# Altium PCB SLT.PcbDoc (part 2 of 8)
Units mm, origin at the board's own origin, x right, y up, seen from the top; angles counter-clockwise.
Board outline 150 x 66 mm, 6 copper layers (L1 TOP, L2 GND 1, L3 SIGNAL, L4 PWR, L5 GND 2, L6 BOT), stack 1.598 mm thick; 797 components, 541 nets, 2680 pads, 2120 vias.
Unrouted connection lines stored in the file: 31.
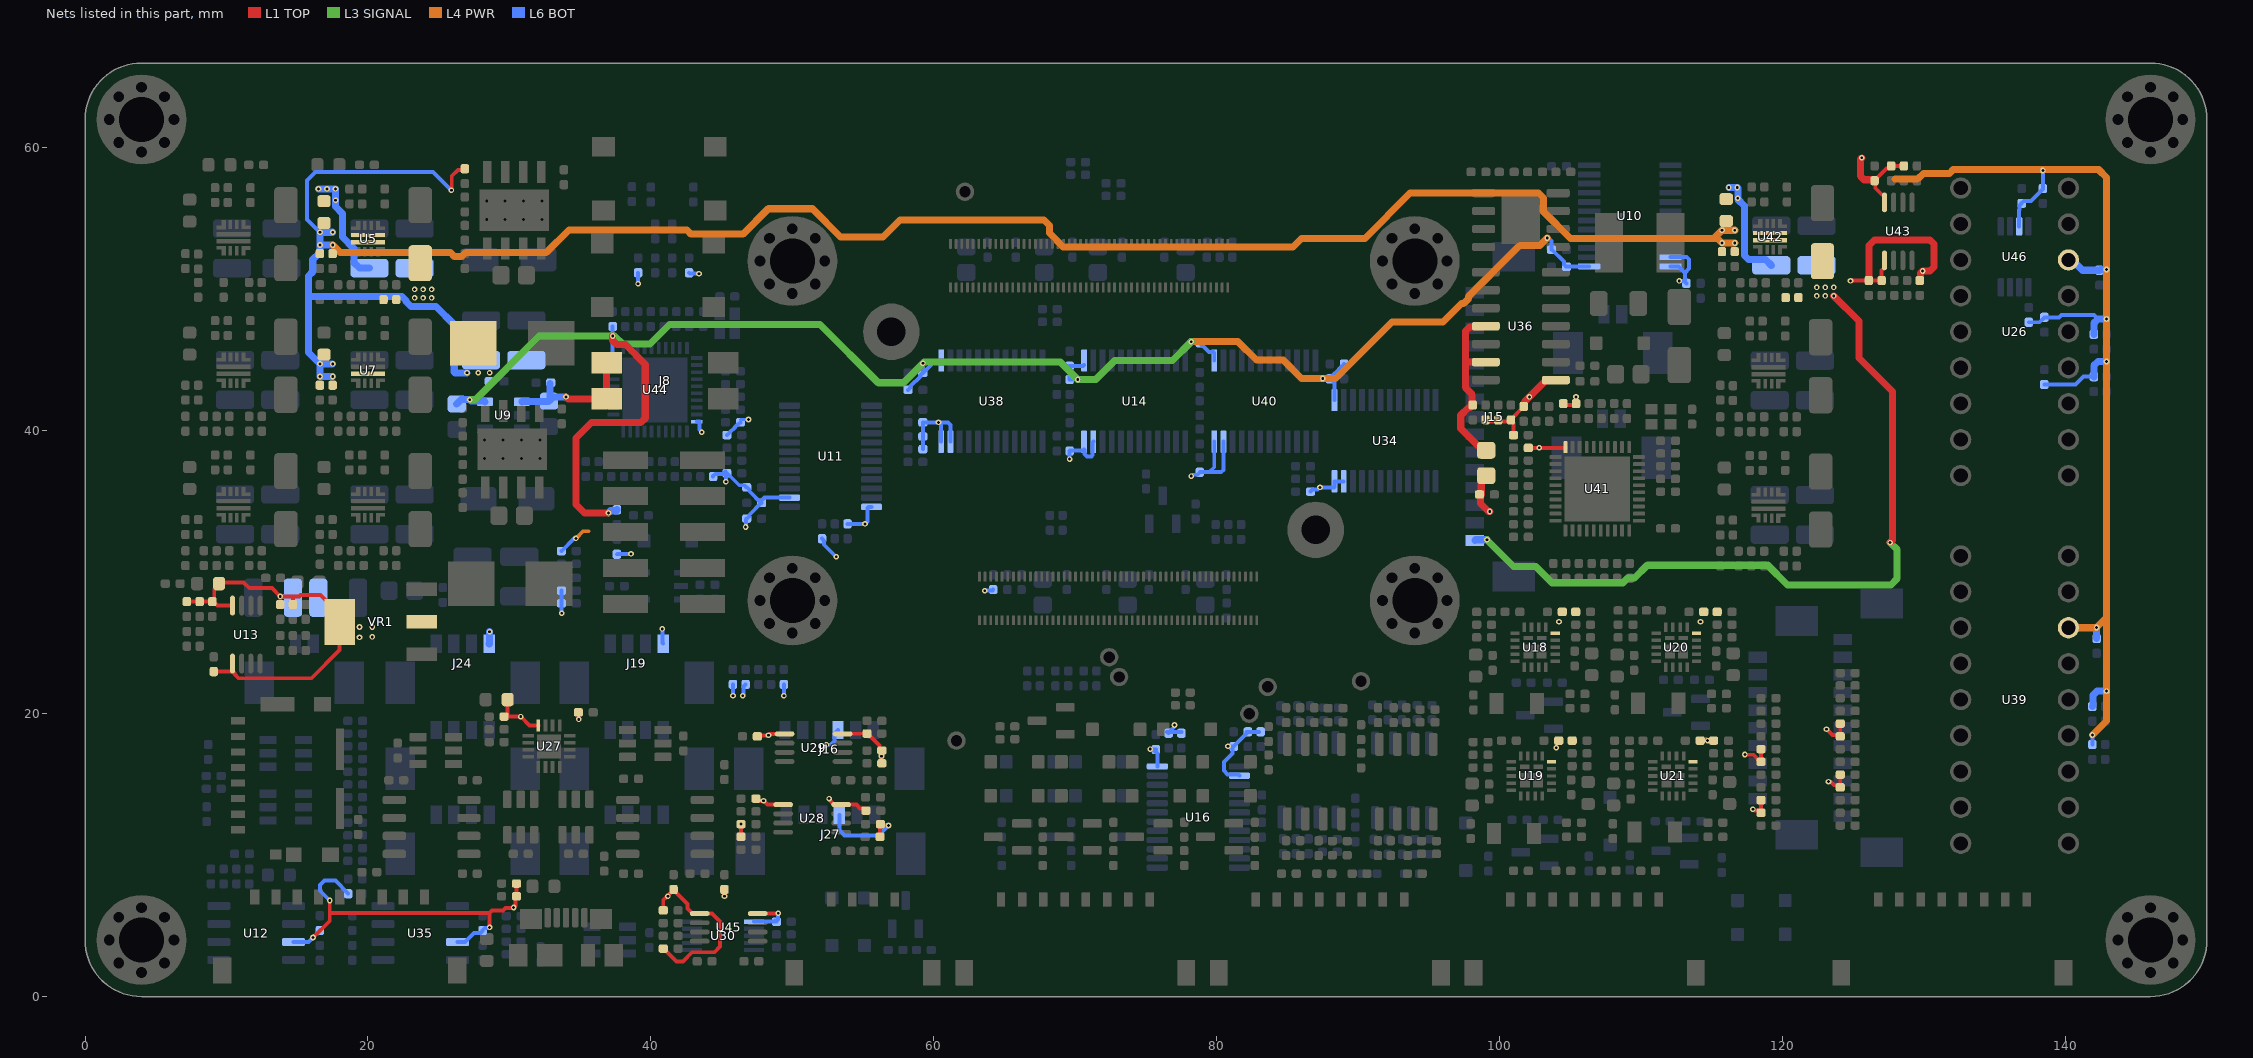
[diagram p6: the nets of this part, all layers, seen from the top]

## Components (designator, comment, footprint, x,y, rotation, side; value= is the part's Value field where it differs from the comment) (continued)
R259 "22R" RES_C_1005X40 18.9,5.2 r270 bottom
R260 "10k" RES_C_1005X40 100.8,41.3 r90 top
R261 "22R" RES_C_1005X40 10.7,8.5 r270 bottom
R262 "4.7k" RES_C_1005X40 99,41.3 r270 top
R263 "22R" RES_C_1005X40 8.9,8.5 r90 bottom
R264 "10k" RES_C_1005X40 99.9,41.3 r270 top
R265 "22R" RES_C_1005X40 28.1,3.1 r270 bottom
R266 "4.7k" RES_C_1005X40 41.4,3.4 r0 top
R267 "0.2R/1W" RES_C_3216X70 108.4,49 r0 top
R268 "1k" RES_C_1005X40 102.5,58.3 r0 top
R269 "10k" RES_C_1005X40 104.5,58.3 r180 top
R270 "4.7k" RES_C_1005X40 41.4,6.1 r0 top
R271 "22R" RES_C_1005X40 41.4,5.2 r180 top
R272 "22R" RES_C_1005X40 41.4,4.3 r180 top
R273 "22R" RES_C_1005X40 47.1,2.5 r180 top
R274 "10k" RES_C_1005X40 43.8,2.5 r180 top
R275 "10k" RES_C_1005X40 119,13 r0 top
R276 "DNP/0R" RES_C_1005X40 81.721,32.85 r90 bottom
R277 "4.7k" RES_C_1005X40 127.675,58.2 r270 top
R278 "4.7k" RES_C_1005X40 128.575,58.2 r270 top
R279 "22R" RES_C_1005X40 127.9,50.1 r270 top
R280 "22R" RES_C_1005X40 128.8,50.1 r270 top
R281 "22R" RES_C_1005X40 106.3,41.4 r270 top
R282 "22R" RES_C_1005X40 107.2,41.4 r270 top
R283 "10k" RES_C_1005X40 114.2,49.9 r270 bottom
R284 "10k" RES_C_1005X40 104.2,52.8 r180 bottom
R285 "10k" RES_C_1005X40 104.2,58.7 r180 bottom
R286 "22R" RES_C_1005X40 108.1,41.4 r270 top
R287 "22R" RES_C_1005X40 109,41.4 r270 top
R288 "22R" RES_C_1005X40 102.6,41.2 r270 top
R289 "10k" RES_C_1005X40 45.8,40.6 r0 bottom
R290 "22R" RES_C_1005X40 45.8,41.5 r180 bottom
R291 "22R" RES_C_1005X40 45.8,42.4 r180 bottom
R292 "22R" RES_C_1005X40 45.8,43.3 r180 bottom
R293 "22R" RES_C_1005X40 45.8,44.2 r180 bottom
R294 "22R" RES_C_1005X40 45.9,37.9 r180 bottom
R295 "22R" RES_C_1005X40 66.6,22.5 r90 bottom
R296 "22R" RES_C_1005X40 75,36.425 r90 bottom
R297 "DNP/22R" RES_C_1005X40 69.5,22.5 r270 bottom
R298 "DNP/22R" RES_C_1005X40 68.6,22.5 r270 bottom
R299 "22R" RES_C_1005X40 103.5,41.2 r270 top
R300 "22R" RES_C_1005X40 45.9,38.8 r180 bottom
R301 "470k" RES_C_1005X40 116.617,52.141 r90 top
R302 "47k" RES_C_1005X40 120.217,49.941 r270 top
R303 "47k" RES_C_1005X40 121.117,49.941 r270 top
R304 "22R" RES_C_1005X40 117.917,49.941 r270 top
R305 "DNP/10k" RES_C_1005X40 117.017,49.941 r270 top
R306 "133k" RES_C_1005X40 115.717,49.941 r270 top
R307 "10k" RES_C_1005X40 118.817,49.941 r270 top
R308 "1.6k" RES_C_1005X40 118.71,56.706 r270 top
R309 "4.7k" RES_C_1005X40 58.7,38.7 r180 bottom
R310 "4.7k" RES_C_1005X40 52.1,32.9 r90 bottom
R311 "22R" RES_C_1005X40 53,32.9 r90 bottom
R312 "22R" RES_C_1005X40 58.7,37.8 r180 bottom
R313 "4.7k" RES_C_1005X40 47.3,33.8 r0 bottom
R314 "10k" RES_C_1005X40 68.7,39.1 r90 bottom
R315 "4.7k" RES_C_1005X40 47.3,36 r0 bottom
R316 "4.7k" RES_C_1005X40 58.7,39.6 r0 bottom
R317 "10k" RES_C_1005X40 69.6,43.1 r90 bottom
R318 "22R" RES_C_1005X40 77.6,21.5 r180 top
R319 "22R" RES_C_1005X40 77.6,20.6 r180 top
R320 "10k" RES_C_1005X40 69.6,41.1 r270 bottom
R321 "10k" RES_C_1005X40 86.1,36.6 r180 bottom
R322 "22R" RES_C_1005X40 55.8,19.5 r0 top
R323 "22R" RES_C_1005X40 55.7,14.1 r180 top
R324 "470k" RES_C_1005X40 116.492,42.665 r90 top
R325 "47k" RES_C_1005X40 120.092,40.465 r270 top
R326 "47k" RES_C_1005X40 120.992,40.465 r270 top
R327 "22R" RES_C_1005X40 117.792,40.465 r270 top
R328 "DNP/10k" RES_C_1005X40 116.892,40.465 r270 top
R329 "47k" RES_C_1005X40 115.592,40.465 r270 top
R330 "10k" RES_C_1005X40 118.692,40.465 r270 top
R331 "1.6k" RES_C_1005X40 118.585,47.231 r270 top
R332 "470k" RES_C_1005X40 116.493,33.165 r90 top
R333 "47k" RES_C_1005X40 120.093,30.965 r270 top
R334 "47k" RES_C_1005X40 120.993,30.965 r270 top
R335 "22R" RES_C_1005X40 117.793,30.965 r270 top
R336 "DNP/10k" RES_C_1005X40 116.893,30.965 r270 top
R337 "47k" RES_C_1005X40 115.593,30.965 r270 top
R338 "10k" RES_C_1005X40 118.693,30.965 r270 top
R339 "1.6k" RES_C_1005X40 118.586,37.731 r270 top
R340 "10k" RES_C_1005X40 89,44.2 r90 bottom
R341 "10k" RES_C_1005X40 86.1,37.5 r180 bottom
R342 "10k" RES_C_1005X40 58.7,41.5 r180 bottom
R343 "10k" RES_C_1005X40 58.7,42.9 r180 bottom
R344 "10k" RES_C_1005X40 68.7,43.1 r90 bottom
R345 "10k" RES_C_1005X40 78.8,39.6 r270 bottom
R346 "10k" RES_C_1005X40 78.8,43.6 r90 bottom
R347 "10k" RES_C_1005X40 78.8,41.6 r270 bottom
R348 "10k" RES_C_1005X40 41.6,8.1 r90 top
R349 "10k" RES_C_1005X40 45.2,8.1 r90 top
R350 "10k" RES_C_1005X40 29.975,7.1 r180 top
R351 "10k" RES_C_1005X40 29.975,8 r180 top
R352 "10k" RES_C_1005X40 104.5,41.4 r90 top
R353 "10k" RES_C_1005X40 101.5,39.7 r180 top
R354 "10k" RES_C_1005X40 45.9,39.7 r180 bottom
R355 "10k" RES_C_1005X40 44.4,37.3 r270 bottom
R356 "1k" RES_C_1005X40 12.1,58.8 r180 top
R357 "4.7k" RES_C_1005X40 138.5,43.8 r90 bottom
R358 "4.7k" RES_C_1005X40 138.5,47.5 r270 bottom
R359 "4.7k" RES_C_1005X40 137.4,48.2 r90 bottom
R360 "4.7k" RES_C_1005X40 138.4,56.6 r270 bottom
SW1 "PushB" TACTSW6X6SM 40.5,51 r0 top locked
SW2 "PushB" TACTSW6X6SM 40.6,57.825 r0 top locked
TP3 "" Testpoint_TH_D130H80 72.4,24 r90 top
TP4 "" Testpoint_TH_D130H80 73.1,22.6 r90 top
TP5 "" Testpoint_TH_D130H80 62.2,56.9 r90 top
TP6 "" Testpoint_TH_D130H80 61.6,18.1 r90 top
TP7 "" Testpoint_TH_D130H80 90.2,22.3 r90 top
TP8 "" Testpoint_TH_D130H80 82.3,20 r90 top
TP9 "" Testpoint_TH_D130H80 83.6,21.9 r90 top
U1 "TPS5450DDAR" DDA0008J 30.35,55.6 r270 top
U2 "TPS259470ARPWR" VQFN-HR-10 10.493,53.665 r90 top
U3 "TPS259470ARPWR" VQFN-HR-10 20,34.8 r90 top
U4 "TPS259470ARPWR" VQFN-HR-10 10.5,34.8 r90 top
U5 "TPS259470ARPWR" VQFN-HR-10 20,53.6 r90 top
U6 "TPS259470ARPWR" VQFN-HR-10 10.5,44.3 r90 top
U7 "TPS259470ARPWR" VQFN-HR-10 20,44.3 r90 top
U8 "TPS5450DDAR" DDA0008J 30.2,38.7 r270 top
U9 "TLV75518PDBVR" SOT25 29.575,41.1 r180 bottom
U10 "SN74AXCH8T245PWR" SOP65P640X120-24N 109.2,55.2 r0 bottom
U11 "TCA6416APWR" SOP65P440W-24N 52.7,38.2 r0 bottom
U12 "SN65HVD230DR" SOIC127P602X173-8N 12.1,4.5 r180 bottom
U13 "PCA9508DP,118" TSOP8 11.4,25.6 r90 top
U14 "SN74AXCH8T245PWR" SOP65P640X120-24N 74.2,42.1 r270 bottom
U15 "IC_PWRSW_MIC2026-1YM" SOIC127P602X173-8N 41,12 r180 top
U16 "TCA6416APWR" SOP65P440W-24N 78.7,12.7 r180 bottom
U17 "IC_PWRSW_MIC2026-1YM" SOIC127P602X173-8N 24.5,12 r180 top
U18 "LT8722AV#PBF" QFN18 102.5,24.7 r270 top
U19 "LT8722AV#PBF" QFN18 102.25,15.6 r270 top
U20 "LT8722AV#PBF" QFN18 112.5,24.7 r270 top
U21 "LT8722AV#PBF" QFN18 112.25,15.6 r270 top
U22 "OPA2340UA" SOIC127P602X173-8N 93.1,15.3 r270 bottom
U23 "OPA2340UA" SOIC127P602X173-8N 86.9,15.2 r90 top
U24 "OPA2340UA" SOIC127P602X173-8N 86.495,15.335 r270 bottom
U25 "OPA2340UA" SOIC127P602X173-8N 93.4,15.2 r90 top
U26 "mp-HighDriver" MP_HIGHDRIVER 136.4,47 r270 top locked
U27 "FSUSB74MPX" QFN50P300X300X80-17N 32.8,17.7 r270 top
U28 "PCA9508DP,118" TSOP8 51.4,12.6 r0 top
U29 "PCA9508DP,118" TSOP8 51.5,17.6 r0 top
U30 "FSUSB42MUX" FP-846AP-MFG 45.1,4.3 r180 bottom
U31 "74AUP1G07" SOT-23-5_DIO 40.8,29.025 r180 bottom
U32 "IP4220CZ6" SOT95P280X145-6N 14.2,17.2 r180 bottom
U33 "IP4220CZ6" SOT95P280X145-6N 14.2,13.4 r180 bottom
U34 "SN74AXCH8T245PWR" SOP65P640X120-24N 91.9,39.3 r270 bottom
U35 "SN65HVD230DR" SOIC127P602X173-8N 23.7,4.5 r180 bottom
U36 "MCP4902-E/ST" SOIC127P600X175-14N 101.5,47.4 r180 top
U37 "AL8843SP-13" SOIC127P602X173-8N_EPAD 101.5,54.9 r180 top
U38 "SN74AXCH8T245PWR" SOP65P640X120-24N 64.1,42.1 r270 bottom
U39 "mp-HighDriver" MP_HIGHDRIVER 136.4,21 r270 top locked
U40 "SN74AXCH8T245PWR" SOP65P640X120-24N 83.4,42.1 r270 bottom
U41 "IC_ADC_AD4114BCPZ" QFN50P600X600X100-41N 106.9,35.9 r180 top
U42 "TPS259470ARPWR" VQFN-HR-10 119.117,53.741 r90 top
U43 "PCA9508DP,118" TSOP8 128.175,54.1 r90 top
U44 "IC_ADC_AD4114BCPZ" QFN50P600X600X100-41N 40.3,42.9 r270 bottom
U45 "PCA9508DP,118" TSOP8 45.5,4.9 r0 top
U46 "PCA9540BDP,118" SOP65P510X110X300W-8 136.4,52.3 r270 bottom
U48 "TPS259470ARPWR" VQFN-HR-10 118.992,44.265 r90 top
U49 "TC1047AVNBTR" SOT95P240X120-3N 76.175,34.421 r90 bottom
U50 "TPS259470ARPWR" VQFN-HR-10 118.993,34.765 r90 top
VR1 "LM1117MP-3.3/NOPB" VREG_LM1117MP-3.3/NOPB 20.9,26.5 r180 top
Y1 "ECS-240-12-37B-CKY-TR" XTAL_ECS-240-12-37B-CKY-TR 111.4,41 r180 top
Y2 "ECS-240-12-37B-CKY-TR" XTAL_ECS-240-12-37B-CKY-TR 45.4,47.6 r270 bottom

## Footprints (in the part's own frame and the unit in brackets; to place one, negate y for a bottom-side part, rotate by r counter-clockwise, add the part's x,y. Pads: shape width x height; smd on the part's side, far side on the other; paste and mask are expansions set on the pad)
47346-0001_MOL [mil]
  rrect50% 18x54 smd: 1(-51.18,101.58) 2(-25.59,101.58) 3(0,101.58) 4(25.59,101.58) 5(51.18,101.58)
  rect 51.18x62.99 smd paste-3.94: 6(-132.87,-3.14) 6(132.87,-3.14)
  rect 61x56 smd paste-3.94: 6(-97.93,98.24) 6(97.93,98.24)
  rect 70.87x62.99 smd paste-3.94: 6(-45.28,-3.14)
  rect 39.37x62.99 smd paste-3.94: 6(61,-3.14)
  silkscreen extent -155,42 117,120, body extent -157,-109 157,104, height 106
B2B04M2X50R [mm]
  rrect50% 0.2x0.7 smd paste+0 mask+0.025: 1(9.8,-1.54) 2(9.8,1.54) 3(9.4,-1.54) 4(9.4,1.54) 5(9,-1.54) 6(9,1.54) 7(8.6,-1.54) 8(8.6,1.54) 9(8.2,-1.54) 10(8.2,1.54) 11(7.8,-1.54) 12(7.8,1.54) 13(7.4,-1.54) 14(7.4,1.54) 15(7,-1.54) 16(7,1.54) 17(6.6,-1.54) 18(6.6,1.54) 19(6.2,-1.54) 20(6.2,1.54) 21(5.8,-1.54) 22(5.8,1.54) 23(5.4,-1.54) 24(5.4,1.54) 25(5,-1.54) 26(5,1.54) 27(4.6,-1.54) 28(4.6,1.54) 29(4.2,-1.54) 30(4.2,1.54) 31(3.8,-1.54) 32(3.8,1.54) 33(3.4,-1.54) 34(3.4,1.54) 35(3,-1.54) 36(3,1.54) 37(2.6,-1.54) 38(2.6,1.54) 39(2.2,-1.54) 40(2.2,1.54) 41(1.8,-1.54) 42(1.8,1.54) 43(1.4,-1.54) 44(1.4,1.54) 45(1,-1.54) 46(1,1.54) 47(0.6,-1.54) 48(0.6,1.54) 49(0.2,-1.54) 50(0.2,1.54) 51(-0.2,-1.54) 52(-0.2,1.54) 53(-0.6,-1.54) 54(-0.6,1.54) 55(-1,-1.54) 56(-1,1.54) 57(-1.4,-1.54) 58(-1.4,1.54) 59(-1.8,-1.54) 60(-1.8,1.54) 61(-2.2,-1.54) 62(-2.2,1.54) 63(-2.6,-1.54) 64(-2.6,1.54) 65(-3,-1.54) 66(-3,1.54) 67(-3.4,-1.54) 68(-3.4,1.54) 69(-3.8,-1.54) 70(-3.8,1.54) 71(-4.2,-1.54) 72(-4.2,1.54) 73(-4.6,-1.54) 74(-4.6,1.54) 75(-5,-1.54) 76(-5,1.54) 77(-5.4,-1.54) 78(-5.4,1.54) 79(-5.8,-1.54) 80(-5.8,1.54) 81(-6.2,-1.54) 82(-6.2,1.54) 83(-6.6,-1.54) 84(-6.6,1.54) 85(-7,-1.54) 86(-7,1.54) 87(-7.4,-1.54) 88(-7.4,1.54) 89(-7.8,-1.54) 90(-7.8,1.54) 91(-8.2,-1.54) 92(-8.2,1.54) 93(-8.6,-1.54) 94(-8.6,1.54) 95(-9,-1.54) 96(-9,1.54) 97(-9.4,-1.54) 98(-9.4,1.54) 99(-9.8,-1.54) 100(-9.8,1.54)
  L1 TOP keep-out region: 9.9,1.15 -9.9,1.15 -9.9,0.75 9.9,0.75
  L1 TOP keep-out region: 9.9,-0.75 -9.9,-0.75 -9.9,-1.15 9.9,-1.15
  silkscreen extent -11.4,-2.2 11.4,1.6, body extent -11.4,-1.54 11.4,1.54, height 1.6
CAP_C_1005X60 [mm]
  rrect50% 0.65x0.6 smd mask+0.05: 1(-0.525,0) 2(0.525,0)
  silkscreen extent -0.07,-0.3 0.07,0.3, body extent -0.5,-0.26 0.5,0.27, height 0.35
CAP_C_1608X80 [mm] "Chip Capacitor, 2-Leads, Body 1.60x0.80mm, IPC Medium Density"
  rrect50% 0.85x0.95 smd: 1(-0.775,0) 2(0.775,0)
  silkscreen extent -0.9,-0.7 0.9,0.7, body extent -0.87,-0.48 0.87,0.48, height 0.85
CAP_C_2012X110 [mm] "Chip Capacitor, 2-Leads, Body 2.00x1.25mm, IPC High Density"
  rrect41% 1.2x1.3 smd: 1(-0.9,0) 2(0.9,0)
  silkscreen extent -1.1,-0.9 1.1,0.9, body extent -1.1,-0.72 1.1,0.72, height 1.1
CAP_C_3225X80 [mm] "Chip Capacitor, 2-Leads, Body 3.20x2.50mm, IPC Medium Density"
  rrect38% 1.3x2.7 smd: 1(-1.4,0) 2(1.4,0)
  silkscreen extent -0.6,-1.35 0.6,1.35, body extent -1.7,-1.35 1.7,1.35, height 0.75
CONN_54202-T0805ALF [mil]
  rect 50x125 smd paste+0 mask+0: 1(-200,-107.5) 2(-100,-107.5) 3(0,-107.5) 4(100,-107.5) 5(200,-107.5) 6(-200,107.5) 7(-100,107.5) 8(0,107.5) 9(100,107.5) 10(200,107.5)
  silkscreen extent -283,-157 255,158, body extent -250,-145 250,145, height 380
DDA0008J [mm]
  rect 1.55x0.6 smd paste+0 mask+0.051: 1(-2.7,1.905) 2(-2.7,0.635) 3(-2.7,-0.635) 4(-2.7,-1.905) 5(2.7,-1.905) 6(2.7,-0.635) 7(2.7,0.635) 8(2.7,1.905)
  round 0.5 / inner round 1.524 / far side round 0.5 hole 0.203 paste-2539.97 mask+0.051: 9(-0.65,1.95) 9(-0.65,0.65) 9(-0.65,-0.65) 9(-0.65,-1.95) 9(0.65,1.95) 9(0.65,0.65) 9(0.65,-0.65) 9(0.65,-1.95)
  rect 2.95x4.9 smd paste-2.437 mask-2.438: 9(0,0)
  silkscreen extent -3.47,-2.55 1.58,2.55
DO-214AC_SMA [mm] "Molded Diode, 2-Leads, Body 5.20x2.61mm, IPC Medium Density"
  rrect30% 2.55x1.65 smd: 1(-2.05,0) 2(2.05,0)
  silkscreen extent -3.6,-1.5 2.8,1.5, body extent -2.6,-1.3 2.6,1.3, height 2.4
FP-846AP-MFG [mm]
  rect 1.4x0.3 smd paste+0 mask+0: 1(-2.2,1) 2(-2.2,0.5) 3(-2.2,0) 4(-2.2,-0.5) 5(-2.2,-1) 6(2.2,-1) 7(2.2,-0.5) 8(2.2,0) 9(2.2,0.5) 10(2.2,1)
  silkscreen extent -2.73,-1.55 1.55,1.92, body extent -2.46,-1.5 2.46,1.5, height 1.1
HEX-M3 [mil]
  round 60 hole 30 mask+0: 1(-90,0) 1(-63.64,-63.64) 1(-63.64,63.64) 1(0,-90) 1(0,90) 1(63.64,-63.64) 1(63.64,63.64) 1(90,0)
  round 250 hole 125.2: 1(0,0)
IND730660x480 [mm] "Precision Wire Wound Inductor, 2-Leads, Body 7.30x6.60mm, IPC Medium Density"
  rect 3.3x3.15 smd: 1(-2.75,0) 2(2.75,0)
  silkscreen extent -3.8,-3.45 3.8,3.45, body extent -3.6,-3.3 3.6,3.3, height 4.91
IND_C_2012X65 [mm] "Chip Inductor, 2-Leads, Body 2.00x1.25mm, IPC High Density"
  rrect41% 1.2x1.3 smd: 1(-0.9,0) 2(0.9,0)
  silkscreen extent -1.1,-0.9 1.1,0.9, body extent -1.07,-0.7 1.07,0.7, height 0.65
L-SMD-M-3.5x3.5x2mm [mm]
  rect 1.5x1 smd: 1(0.032,-1.385) 2(0.032,1.461)
  silkscreen extent -1.73,-2.2 1.73,2.2, body extent -1.58,-1.73 1.62,1.76, height 1.84
L-SMD-M-4.8x4.8x2.8mm [mm]
  rect 4.2x2 smd: 1(0,-2.17) 2(0,2.17)
  silkscreen extent -2.6,-2.5 2.6,2.5, body extent -2.41,-2.4 2.41,2.4, height 2.76
LED_0603 [mm]
  rrect50% 0.85x0.95 smd: 1(-0.775,0) 2(0.775,0)
  silkscreen extent -1.4,-0.7 0.9,0.7, body extent -0.8,-0.4 0.8,0.4, height 0.7
MOLEX_0533980271 [mm]
  rect 0.8x1.3 smd mask+0.076: 1(0.625,-1.75) 2(-0.625,-1.75)
  rect 2.1x3 smd mask+0.076: M1(-3.175,1) M2(3.175,1)
  silkscreen extent -3.83,-2.6 3.83,2.1, body extent -3.83,-2.1 3.83,2.1, height 4.7
MOLEX_0533980471 [mm]
  rect 0.8x1.3 smd mask+0.076: 1(1.875,-1.75) 2(0.625,-1.75) 3(-0.625,-1.75) 4(-1.875,-1.75)
  rect 2.1x3 smd mask+0.076: M1(4.425,1) M2(-4.425,1)
  silkscreen extent -5.08,-2.6 5.07,2.1, body extent -5.07,-2.15 5.07,2.05, height 4.7
MOLEX_0533980671 [mm]
  rect 0.8x1.3 smd mask+0.076: 1(3.125,-1.75) 2(1.875,-1.75) 3(0.625,-1.75) 4(-0.625,-1.75) 5(-1.875,-1.75) 6(-3.125,-1.75)
  rect 2.1x3 smd mask+0.076: M1(-5.675,1) M2(5.675,1)
  silkscreen extent -6.32,-2.7 6.32,2.1, body extent -6.32,-2.1 6.32,2.1, height 4.7
MOLEX_0533980971 [mm]
  rect 0.8x1.3 smd mask+0.076: 1(5,-1.75) 2(3.75,-1.75) 3(2.5,-1.75) 4(1.25,-1.75) 5(0,-1.75) 6(-1.25,-1.75) 7(-2.5,-1.75) 8(-3.75,-1.75) 9(-5,-1.75)
  rect 2.1x3 smd mask+0.076: M1(-7.55,1) M2(7.55,1)
  silkscreen extent -8.2,-2.6 8.2,2.1, body extent -8.3,-2.05 8.1,2.15, height 4.7
MOLEX_0533981171 [mm]
  rect 0.8x1.3 smd mask+0.076: 1(6.25,-1.75) 2(5,-1.75) 3(3.75,-1.75) 4(2.5,-1.75) 5(1.25,-1.75) 6(0,-1.75) 7(-1.25,-1.75) 8(-2.5,-1.75) 9(-3.75,-1.75) 10(-5,-1.75) 11(-6.25,-1.75)
  rect 2.1x3 smd mask+0.076: M1(-8.8,1) M2(8.8,1)
  silkscreen extent -9.45,-2.6 9.45,2.1, body extent -9.45,-2.15 9.45,2.05, height 4.7
MOLEX_0533981571 [mm]
  rect 0.8x1.3 smd mask+0.076: 1(8.75,-1.75) 2(7.5,-1.75) 3(6.25,-1.75) 4(5,-1.75) 5(3.75,-1.75) 6(2.5,-1.75) 7(1.25,-1.75) 8(0,-1.75) 9(-1.25,-1.75) 10(-2.5,-1.75) 11(-3.75,-1.75) 12(-5,-1.75) 13(-6.25,-1.75) 14(-7.5,-1.75) 15(-8.75,-1.75)
  rect 2.1x3 smd mask+0.076: M1(-11.3,1) M2(11.3,1)
  silkscreen extent -11.95,-2.7 11.95,2.1, body extent -11.95,-2.1 11.95,2.1, height 4.7
MOLEX_1051620001 [mil]
  rect 115x22 smd: 14(-84.45,146.35) 15(80.51,146.35)
  rect 41x43 smd: G1(209.65,17.02)
  rect 41x47 smd: G2(209.65,119.78) G3(-209.64,97.33)
  rect 41x94 smd: G4(-209.65,-28.06)
  rect 20x39 smd: P1(139.76,-138.49) P2(96.46,-138.49) P3(53.15,-138.49) P4(9.84,-138.49) P5(-33.46,-138.49) P6(-76.77,-138.49) P7(-120.08,-138.49) P8(-163.39,-138.49)
  rect 28x31 smd: P9(209.06,-32.98)
  silkscreen extent -228,-154 228,154, body extent -222,-485 226,150, height 59
MOLEX_5040500491 [mm]
  rect 0.6x1 smd mask+0.076: 1(2.25,-2.87) 2(0.75,-2.87) 3(-0.75,-2.87) 4(-2.25,-2.87)
  rect 1.25x1.8 smd mask+0.076: M1(4.855,2.32) M2(-4.855,2.32)
  silkscreen extent -5.28,-3.7 5.28,3.22, body extent -5.27,-3.2 5.28,3.24, height 2
MOLEX_5040500891 [mm]
  rect 0.6x1 smd mask+0.076: 1(5.25,-2.87) 2(3.75,-2.87) 3(2.25,-2.87) 4(0.75,-2.87) 5(-0.75,-2.87) 6(-2.25,-2.87) 7(-3.75,-2.87) 8(-5.25,-2.87)
  rect 1.25x1.8 smd mask+0.076: M1(7.855,2.32) M2(-7.855,2.32)
  silkscreen extent -8.28,-3.7 8.28,3.22, body extent -8.27,-3.2 8.27,3.24, height 2
MOLEX_5040500991 [mil]
  rect 26x41 smd paste+0 mask+0: 1(236.22,-119.76) 2(177.17,-119.76) 3(118.11,-119.76) 4(59.06,-119.76) 5(0,-119.76) 6(-59.06,-119.76) 7(-118.11,-119.76) 8(-177.17,-119.76) 9(-236.22,-119.76)
  rect 51x73 smd: M1(-326.97,84.57) M2(326.97,84.57)
  silkscreen extent -344,-150 344,125, body extent -355,-126 355,128, height 79
MP_HIGHDRIVER [mm]
  round 1.5 hole 1 paste-2539.97 mask+0: 1(-10.16,-3.81) 2(-7.62,-3.81) 3(-5.08,-3.81) 4(-2.54,-3.81) 5(0,-3.81) 6(2.54,-3.81) 7(5.08,-3.81) 8(7.62,-3.81) 9(10.16,-3.81) 10(10.16,3.81) 11(7.62,3.81) 12(5.08,3.81) 13(2.54,3.81) 14(0,3.81) 15(-2.54,3.81) 16(-5.08,3.81) 17(-7.62,3.81) 18(-10.16,3.81)
  silkscreen extent -12.7,-5.38 12.7,5.08, body extent -12.88,-5.15 12.88,5.2, height 7.25
QFN18 [mm]
  rect 0.25x0.65 smd paste+0 mask+0.05: 1(-1,-1.425) 2(-0.5,-1.425) 3(0,-1.425) 4(0.5,-1.425) 5(1,-1.425) 10(1,1.425) 11(0.5,1.425) 13(-0.5,1.425) 14(-1,1.425)
  rect 0.65x0.25 smd paste+0 mask+0.05: 6(1.41,-0.75) 7(1.41,-0.25) 8(1.41,0.25) 9(1.41,0.75) 15(-1.41,0.75) 16(-1.41,0.25) 17(-1.41,-0.25) 18(-1.41,-0.75)
  rect 0.229x0.65 smd paste+0 mask+0.05: 12(0,1.425)
  rect 0.3x0.65 smd paste+0 mask+0.05: 19(-0.65,-0.475) 20(-0.65,0.475)
  rect 1x0.7 smd paste+0 mask+0: 21(0.3,-0.45) 22(0.3,0.45)
  silkscreen extent -1.72,-1.58 1.58,1.6, body extent -1.5,-1.5 1.5,1.5, height 1.04
QFN50P300X300X80-17N [mm]
  rrect7% 0.83x0.26 smd mask+0.04: 1(-1.47,0.75) 2(-1.47,0.25) 3(-1.47,-0.25) 4(-1.47,-0.75) 9(1.47,-0.75) 10(1.47,-0.25) 11(1.47,0.25) 12(1.47,0.75)
  rrect7% 0.26x0.83 smd mask+0.04: 5(-0.75,-1.47) 6(-0.25,-1.47) 7(0.25,-1.47) 8(0.75,-1.47) 13(0.75,1.47) 14(0.25,1.47) 15(-0.25,1.47) 16(-0.75,1.47)
  rect 1.7x1.7 smd paste-2 mask+0.04: 17(0,0)
  silkscreen extent -2.6,-1.58 1.58,1.58, body extent -1.5,-1.5 1.5,1.5, height 0.8
QFN50P600X600X100-41N [mm]
  rrect25% 0.84x0.26 smd mask+0.05: 1(-2.945,2.25) 2(-2.945,1.75) 3(-2.945,1.25) 4(-2.945,0.75) 5(-2.945,0.25) 6(-2.945,-0.25) 7(-2.945,-0.75) 8(-2.945,-1.25) 9(-2.945,-1.75) 10(-2.945,-2.25) 21(2.945,-2.25) 22(2.945,-1.75) 23(2.945,-1.25) 24(2.945,-0.75) 25(2.945,-0.25) 26(2.945,0.25) 27(2.945,0.75) 28(2.945,1.25) 29(2.945,1.75) 30(2.945,2.25)
  rrect25% 0.26x0.84 smd mask+0.05: 11(-2.25,-2.945) 12(-1.75,-2.945) 13(-1.25,-2.945) 14(-0.75,-2.945) 15(-0.25,-2.945) 16(0.25,-2.945) 17(0.75,-2.945) 18(1.25,-2.945) 19(1.75,-2.945) 20(2.25,-2.945) 31(2.25,2.945) 32(1.75,2.945) 33(1.25,2.945) 34(0.75,2.945) 35(0.25,2.945) 36(-0.25,2.945) 37(-0.75,2.945) 38(-1.25,2.945) 39(-1.75,2.945) 40(-2.25,2.945)
  rect 4.6x4.6 smd paste-3 mask+0.05: 41(0,0)
  silkscreen extent -3.4,-3 3,3, body extent -3,-3 3,3, height 1
RES_C_1005X40 [mm]
  rrect50% 0.65x0.6 smd mask+0.05: 1(-0.525,0) 2(0.525,0)
  silkscreen extent -0.08,-0.3 0.07,0.3, body extent -0.5,-0.25 0.5,0.25, height 0.38
RES_C_1608X60 [mm] "Chip Resistor, 2-Leads, Body 1.63x0.83mm, IPC High Density"
  rrect50% 0.85x0.95 smd: 1(-0.775,0) 2(0.775,0)
  silkscreen extent -0.9,-0.7 0.9,0.7, body extent -0.87,-0.48 0.87,0.48, height 0.6
RES_C_3216X70 [mm] "Chip Resistor, 2-Leads, Body 3.20x1.60mm, IPC Medium Density"
  rrect39% 1.25x1.75 smd: 1(-1.4,0) 2(1.4,0)
  silkscreen extent -0.6,-0.9 0.6,0.9, body extent -1.68,-0.87 1.68,0.87, height 0.71
SOD3717X145N [mm]
  rrect22% 0.9x0.95 smd: 1(-1.68,0) 2(1.681,-0.003)
  silkscreen extent -2.37,-0.85 1.45,0.85, body extent -1.83,-0.77 1.83,0.77, height 1.5
SOIC127P600X175-14N [mm]
  rrect50% 1.97x0.6 smd: 1(-2.475,3.81) 2(-2.475,2.54) 3(-2.475,1.27) 4(-2.475,0) 5(-2.475,-1.27) 6(-2.475,-2.54) 7(-2.475,-3.81) 8(2.475,-3.81) 9(2.475,-2.54) 10(2.475,-1.27) 11(2.475,0) 12(2.475,1.27) 13(2.475,2.54) 14(2.475,3.81)
  silkscreen extent -3.4,-4.4 2,4.4
SOIC127P602X173-8N [mm]
  rrect50% 1.64x0.59 smd: 1(-2.635,1.905) 2(-2.635,0.635) 3(-2.635,-0.635) 4(-2.635,-1.905) 5(2.635,-1.905) 6(2.635,-0.635) 7(2.635,0.635) 8(2.635,1.905)
  silkscreen extent -3.5,-2.5 2,2.5, body extent -3.01,-2.57 3.01,2.57, height 1.73
SOIC127P602X173-8N_EPAD [mm]
  rrect50% 1.64x0.59 smd: 1(-2.635,1.905) 2(-2.635,0.635) 3(-2.635,-0.635) 4(-2.635,-1.905) 5(2.635,-1.905) 6(2.635,-0.635) 7(2.635,0.635) 8(2.635,1.905)
  rect 2.718x3.404 smd paste-0.159: EPAD(0,0)
  silkscreen extent -3.5,-2.5 2,2.5, body extent -3.01,-2.57 3.01,2.57, height 1.73
SOP65P440W-24N [mm] "TSSOP-24 4.40mm Width"
  rrect50% 1.5x0.45 smd: 1(-2.9,3.575) 2(-2.9,2.925) 3(-2.9,2.275) 4(-2.9,1.625) 5(-2.9,0.975) 6(-2.9,0.325) 7(-2.9,-0.325) 8(-2.9,-0.975) 9(-2.9,-1.625) 10(-2.9,-2.275) 11(-2.9,-2.925) 12(-2.9,-3.575) 13(2.9,-3.575) 14(2.9,-2.925) 15(2.9,-2.275) 16(2.9,-1.625) 17(2.9,-0.975) 18(2.9,-0.325) 19(2.9,0.325) 20(2.9,0.975) 21(2.9,1.625) 22(2.9,2.275) 23(2.9,2.925) 24(2.9,3.575)
  silkscreen extent -3.6,-4 2.2,4, body extent -3.2,-3.9 3.2,3.9, height 1.2
SOP65P510X110X300W-8 [mil]
  rrect50% 51.5x18 smd paste+0 mask+0: 1(-84.75,38.39) 2(-84.75,12.8) 3(-84.75,-12.8) 4(-84.75,-38.39) 5(84.75,-38.39) 6(84.75,-12.8) 7(84.75,12.8) 8(84.75,38.39)
  silkscreen extent -106,-59 55,59, body extent -96,-59 96,59, height 43
SOP65P640X120-24N [mm]
  rrect25% 1.57x0.41 smd mask+0.05: 1(-2.87,3.575) 2(-2.87,2.925) 3(-2.87,2.275) 4(-2.87,1.625) 5(-2.87,0.975) 6(-2.87,0.325) 7(-2.87,-0.325) 8(-2.87,-0.975) 9(-2.87,-1.625) 10(-2.87,-2.275) 11(-2.87,-2.925) 12(-2.87,-3.575) 13(2.87,-3.575) 14(2.87,-2.925) 15(2.87,-2.275) 16(2.87,-1.625) 17(2.87,-0.975) 18(2.87,-0.325) 19(2.87,0.325) 20(2.87,0.975) 21(2.87,1.625) 22(2.87,2.275) 23(2.87,2.925) 24(2.87,3.575)
  silkscreen extent -3.8,-3.9 1.9,4, body extent -3.2,-3.9 3.2,3.9, height 1.2
SOT25 [mm]
  rrect16% 1.1x0.6 smd paste+0 mask+0: 1(-1.3,0.95) 2(-1.3,0) 3(-1.3,-0.95) 4(1.3,-0.95) 5(1.3,0.95)
  silkscreen extent -1.8,-1.6 0.9,1.6, body extent -1.43,-1.5 1.43,1.5, height 1.4
SOT95P240X120-3N [mm]
  rrect25% 1.32x0.6 smd: 1(-1,0.95) 2(-1,-0.95) 3(1,0)
  silkscreen extent -1.6,-1.5 0.7,1.5, body extent -1.3,-1.52 1.3,1.52, height 1.2
SOT95P280X145-6N [mm]
  rrect25% 1.21x0.59 smd: 1(-1.255,0.95) 2(-1.255,0) 3(-1.255,-0.95) 4(1.255,-0.95) 5(1.255,0) 6(1.255,0.95)
  silkscreen extent -1.9,-1.5 0.82,1.5, body extent -1.4,-1.46 1.4,1.46, height 1.4
SOT-23-5_DIO [mil]
  rect 38.5x16 smd paste+0 mask+0: 1(-52.75,37) 2(-52.75,0) 3(-52.75,-37) 4(52.75,-37.5) 5(52.75,37.5)
  silkscreen extent -67,-64 39,65, body extent -58,-59 58,59, height 57
SW_1825059-1 [mm]
  rect 2.16x1.52 smd: 1(-4.13,1.27) 2(-4.13,-1.27) 3(4.13,-1.27) 4(4.13,1.27)
  silkscreen extent -5.1,-3.53 3.75,3.53, body extent -4.66,-3.53 4.66,3.53, height 4.4
TACTSW6X6SM [mm]
  rrect0% 1.6x1.4 smd paste+0 mask+0.05: 1(-3.95,2.25) 2(-3.95,-2.25) 3(3.95,2.25) 4(3.95,-2.25)
  silkscreen extent -3,-3.1 3,3.1, body extent -4.75,-3.15 4.75,3.15, height 0.03
Testpoint_TH_D130H80 [mm]
  round 1.3 hole 0.8 paste-2539.97 mask+0: 0(0,0)
Testpoint_TH_D400H200 [mm]
  round 4 hole 2 paste-2539.97 mask+0: 1(0,0)
TSOP8 [mm] "TSOP, 8-Leads, Body 3x3mm, Pitch 0.65mm, IPC High Density"
  oval 1.4x0.35 smd mask+0.051: 1(-2.05,0.975) 2(-2.05,0.325) 3(-2.05,-0.325) 4(-2.05,-0.975) 5(2.05,-0.975) 6(2.05,-0.325) 7(2.05,0.325) 8(2.05,0.975)
  silkscreen extent -2.17,-1.55 0.95,1.87, body extent -2.35,-1.5 2.35,1.5, height 1.5
VQFN-HR-10 [mm]
  rect 0.65x0.3 smd: 1(-0.938,0.692) 4(-0.941,-0.708) 7(0.909,-0.708) 10(0.909,0.692)
  rect 0.25x0.65 smd: 1(-0.738,0.867) 4(-0.741,-0.883) 7(0.709,-0.883) 10(0.709,0.867)
  rect 0.65x0.25 smd: 2(-0.938,0.216) 3(-0.941,-0.233) 8(0.909,-0.233) 9(0.909,0.216)
  rect 0.3x2.4 smd: 5(-0.265,-0.008) 6(0.235,-0.007)
  silkscreen extent -1.3,-1.25 1.28,1.23, body extent -1.03,-1.01 0.97,0.99, height 1
VREG_LM1117MP-3.3/NOPB [mm]
  rect 2.15x0.95 smd: 1(-2.9,2.3) 2(-2.9,0) 3(-2.9,-2.3)
  rect 2.15x3.25 smd: 4(2.9,0)
  silkscreen extent -4,-3.3 1.8,3.3, body extent -3.5,-3.25 3.5,3.25, height 1.8
XTAL_ECS-240-12-37B-CKY-TR [mm]
  rect 0.85x0.75 smd mask+0.05: 1(-0.675,-0.525) 2(0.675,-0.525) 3(0.675,0.525) 4(-0.675,0.525)
  silkscreen extent -1.51,-1.31 1.3,1.1, body extent -1,-0.8 1,0.8, height 0.5

## Part data
C1 C2 C4 C6 C8 C9 C10 C14 C15 C16 C17 C18 C19 C21 C22 C23 C24 C25 C27 C28 C29 C30 C32 C33 C34 C39 C40 C41 C49 C50 C51 C52 C53 C54 C55 C56 C57 C58 C59 C60 C61 C62 C63 C64 C65 C66 C68 C69 C70 C71 C72 C73 C74 C75 C76 C77 C78 C79 C80 C82 C83 C84 C85 C86 C87 C88 C89 C90 C91 C92 C93 C94 C95 C96 C97 C100 C101 C104 C105 C106 C107 C108 C109 C110 C111 C112 C113 C114 C115 C116 C117 C118 C119 C122 C123 C126 C127 C128 C129 C130 C131 C132 C133 C134 C135 C136 C137 C138 C139 C140 C141 C142 C143 C144 C145 C146 C147 C148 C149 C150 C151 C152 C153 C154 C155 C156 C157 C158 C159 C160 C161 C162 C163 C164 C165 C166 C167 C168 C169 C170 C171 C172 C173 C174 C175 C176 C178 C179 C180 C181 C182 C183 C184 C185 C186 C187 C188 C189 C190 C191 C192 C193 C194 C195 C197 C198 C199 C200 C201 C202 C204 C205 C207 C208 C209 C210 C211 C212 C213 C214 C215 C216 C226 C227 C228 C229 C230 C231 C232 C233 C234 C235 C236 C237 C239 C240 C242 C243 C244 C245 C246 C247 C248 C249 C250 C255 C256 C257 C267 C278 C286 C287 C288 C291 C292 C293: library part _CAP_C_2, "CAP CHIP"
C3 C5 C7 C11 C12 C13 C20 C26 C31 C35 C36 C37 C38 C42 C43 C44 C45 C46 C47 C48 C67 C81 C98 C99 C102 C103 C120 C121 C124 C125 C177 C196 C206 C238 C241 C259 C260 C261 C262 C263 C264 C265 C266 C284 C285 C289 C290: library part _CAP_C_High_2, "CAP CHIP High Value"
D2 D3 D4 D5 D6 D7 D8 D10 D13 D27 D30 D31: "DIODE SCHOTTKY 60V 3A DO214AA"
D12 D14 D15 D16 D29: "17V Clamp 5A (8/20Âµs) Ipp Tvs Diode Surface Mount SOT-23-6", Package="SOT-23-6 STMicroelectronics", Availability="In Stock", Check_prices=https://www.snapeda.com/parts/USBLC6-2SC6/STMicroelectronics/view-part/?ref=eda, MF=STMicroelectronics, MP=USBLC6-2SC6, Price=None, Purchase-URL=https://pricing.snapeda.com/search/part/USBLC6-2SC6/?ref=eda, SnapEDA_Link=https://www.snapeda.com/parts/USBLC6-2SC6/STMicroelectronics/view-part/?ref=snap
D17 D18 D19 D20 D21 D22 D23 D24 D32 D33 D34 D35: library part "Diode SMD", "Default Diode", Code - JEDEC=DO-214-AB, Published=8-Jun-2000, Publisher="Altium Limited", Revision="July-2002: Re-released for DXP Platform."
D26 D28: library part "DIODE SCHOTTKY", "DIODE SCHOTTKY 40V 1A SOD123"
DZ1 DZ2 DZ3 DZ4 DZ5 DZ6 DZ7 DZ8: library part "DIODE Zener", "Zenner"
H1 H2 H3 H4 H5 H6 H7 H8 H9 H10: library part HEX-M3
J1 J23 J25: library part "Header 2x1_2M"
J2 J5: library part "Header 9x1_2M"
J3 J4 J6 J13 J14 J26 J29: library part "Header 8x1_2M"
J7: library part "Header 11x1_2M"
J8: library part DIP_SW_2x2
J9 J10 J11 J12 J19 J22 J24: library part "Header 4x1_2M"
J15: library part "Header 15x1_2M"
J18: library part USB_micro, "No Description Available", Mfr_Name="Molex Connector Corporation", RefDes=RefDes, Type=Type
J20: library part "Header 5x2_Z"
J21: "9 (8 + 1) Position Card Connector Secure Digital - microSDâ„¢ Surface Mount, Right Angle Gold", Package=None, Check_prices=https://www.snapeda.com/parts/1051620001/Molex/view-part/?ref=eda, MF=Molex, MP=1051620001, SnapEDA_Link=https://www.snapeda.com/parts/1051620001/Molex/view-part/?ref=snap
JP1 JP2 JP3 JP4 JP5 JP6 JP7 JP8 JP9 JP10: library part JUMPER
L1 L2: library part _IND, "SRP7050TA-100M"
L3 L4 L5 L6: library part L-SMD-1, Inductance="1.0 μH", Manufacturer="Wurth Elektronik", PARTNO=78477010, ComponentLink1Description=Manufacturer, ComponentLink1URL=http://www.we-online.de, ComponentLink2Description=Datasheet, ComponentLink2URL=http://katalog.we-online.de/pbs/datasheet/78477010.pdf, Created by="Baojun Chen", Created Date=Nov.2015
L7: library part Inductor, "MLZ1608N100LT000"
L8: library part L-SMD-1, "SRR4828A-820M", Inductance="1.0 μH", Manufacturer="Wurth Elektronik", PARTNO=78477010, ComponentLink1Description=Manufacturer, ComponentLink1URL=http://www.we-online.de, ComponentLink2Description=Datasheet, ComponentLink2URL=http://katalog.we-online.de/pbs/datasheet/78477010.pdf, Created by="Baojun Chen", Created Date=Nov.2015
P1: library part "Hirose DF40C-100DP-0_0.4V", CLABCONF0=#NAME?, P/N=182K10004S, PCB Footprint=B2B04M2X50P
P2: library part "Hirose DF40C-100DP-0_1.4V", CLABCONF0=#NAME?, P/N=182K10004S, PCB Footprint=B2B04M2X50P
Q1 Q2 Q3 Q4 Q5 Q6 Q7 Q8 Q9 Q10 Q11 Q12: library part MOSFET_N, "N-Channel 30 V 5.7A (Ta) 1.4W (Ta) Surface Mount SOT-23-3", Package="SOT-23 Alpha &amp; Omega Semiconductor Inc.", Check_prices=https://www.snapeda.com/parts/AO3400A/Alpha/view-part/?ref=eda, MF="Alpha & Omega Semiconductor", MP=AO3400A, SnapEDA_Link=https://www.snapeda.com/parts/AO3400A/Alpha/view-part/?ref=snap
R1 R2 R3 R4 R5 R6 R7 R8 R9 R10 R11 R12 R13 R14 R15 R16 R17 R18 R19 R20 R21 R22 R23 R24 R25 R26 R27 R28 R29 R30 R31 R32 R33 R34 R35 R36 R37 R38 R39 R40 R41 R42 R43 R44 R45 R46 R47 R48 R49 R50 R51 R52 R53 R54 R55 R56 R57 R58 R59 R60 R61 R62 R63 R64 R65 R66 R67 R68 R69 R70 R71 R72 R73 R74 R75 R76 R77 R78 R79 R80 R81 R82 R83 R84 R85 R86 R87 R88 R89 R90 R91 R92 R93 R94 R95 R96 R97 R98 R99 R100 R101 R102 R103 R104 R105 R106 R107 R108 R109 R110 R111 R112 R113 R114 R115 R116 R117 R118 R119 R120 R121 R122 R123 R124 R125 R126 R127 R128 R129 R130 R131 R132 R133 R134 R135 R136 R137 R138 R139 R140 R141 R142 R143 R144 R145 R146 R147 R148 R149 R150 R151 R152 R153 R154 R155 R156 R157 R158 R159 R160 R161 R162 R163 R164 R165 R166 R167 R168 R169 R170 R171 R172 R173 R174 R175 R176 R177 R178 R179 R180 R181 R182 R183 R184 R185 R186 R187 R188 R189 R190 R191 R192 R193 R194 R195 R196 R197 R198 R199 R200 R201 R202 R203 R204 R205 R206 R207 R208 R209 R210 R211 R212 R213 R214 R215 R216 R217 R218 R219 R220 R221 R222 R223 R224 R225 R226 R227 R228 R229 R230 R231 R232 R233 R234 R235 R236 R237 R238 R239 R240 R241 R242 R243 R244 R245 R246 R247 R248 R249 R250 R251 R252 R253 R254 R255 R256 R257 R258 R259 R260 R261 R262 R263 R264 R265 R266 R267 R268 R269 R270 R271 R272 R273 R274 R275 R276 R277 R278 R279 R280 R281 R282 R283 R284 R285 R286 R287 R288 R289 R290 R291 R292 R293 R294 R295 R296 R297 R298 R299 R300 R301 R302 R303 R304 R305 R306 R307 R308 R309 R310 R311 R312 R313 R314 R315 R316 R317 R318 R319 R320 R321 R322 R323 R324 R325 R326 R327 R328 R329 R330 R331 R332 R333 R334 R335 R336 R337 R338 R339 R340 R341 R342 R343 R344 R345 R346 R347 R348 R349 R350 R351 R352 R353 R354 R355 R356 R357 R358 R359 R360: library part _RES_B_2, "RES"
SW1 SW2: library part "TACT SW 6x6mm SMT", CLABCONF0=#NAME?, P/N=170B00001S, PCB Footprint=TACTSW6x6SM
TP3 TP4 TP5 TP6 TP7 TP8 TP9: library part "Test Point", "Test Point", Solder=NF
U1 U8: library part TPS5430DDAR, "No Description Available", Mfr_Name="Texas Instruments", RefDes=RefDes, Type=TYPE
U9: library part IC_POWER_AP7347DQ
U10 U14 U34 U38 U40: library part IC_voltage_level_SN74AXCH8T245PWR, "8-Bit Dual-Supply Bus Transceiver", Package="TSSOP-24 Texas Instruments", Availability="In Stock", Check_prices=https://www.snapeda.com/parts/SN74AXCH8T245PWR/Texas+Instruments/view-part/?ref=eda, MF="Texas Instruments", MP=SN74AXCH8T245PWR, Price=None, Purchase-URL=https://pricing.snapeda.com/search/part/SN74AXCH8T245PWR/?ref=eda, SnapEDA_Link=https://www.snapeda.com/parts/SN74AXCH8T245PWR/Texas+Instruments/view-part/?ref=snap
U11 U16: library part IC_I2Cto16IO_TCA6416APWR
U12 U35: library part IC_CAN_SN65HVD230DR, "IC TRANSCEIVER HALF 1/1 8SOIC"
U15 U17: "Power Switch/Driver 1:2 N-Channel 1.25A 8-SOIC", Package="SO-8 Microchip", Check_prices=https://www.snapeda.com/parts/MIC2026-1YM/Microchip/view-part/?ref=eda, MF=Microchip, MP=MIC2026-1YM, SnapEDA_Link=https://www.snapeda.com/parts/MIC2026-1YM/Microchip/view-part/?ref=snap
U18 U19 U20 U21: library part LT8722
U27: library part IC_USB_SW_FSUSB74MPX, "USB Switch IC 1 Channel 16-MLP (3x3)", Package="WQFN-16 ON Semiconductor", Check_prices=https://www.snapeda.com/parts/FSUSB74MPX/Onsemi/view-part/?ref=eda, MF="ON Semiconductor", MP=FSUSB74MPX, SnapEDA_Link=https://www.snapeda.com/parts/FSUSB74MPX/Onsemi/view-part/?ref=snap
U30: library part CMP-07103-000004-1, "IC USB SWITCH DPDT 10MSOP", Case/Package=MSOP, Current=100mA, Max Operating Temperature=85°C, Max Supply Voltage=4.3V, Min Operating Temperature=-40°C, Min Supply Voltage=3V, On-State Resistance=6.5R, Package Quantity=1, Data Rate=480Mbps, Height=0.85mm, Lead Free="Lead Free", Length=3mm, Mount="Surface Mount", Number of Channels=2, Number of Inputs=2, Number of Outputs=4, Number of Pins=10, Operating Supply Voltage=4.3V, Packaging="Tape and Reel", Radiation Hardening=No, REACH SVHC="No SVHC", Supply Type=Single, Throw Configuration=DPDT, Voltage=4.3V, Weight=0.1125g, Width=3mm
U31: library part "74AUP1G07 , buffer ,LV", CLABCONF0=#NAME?, P/N=106D20071S, PCB Footprint=SC70
U32 U33: library part IP4220CZ6_0, CLABCONF0=#NAME?, P/N=132D42200S, PCB Footprint=SOT23-6L
U36: library part MCP4902, "IC DAC 8BIT V-OUT 14TSSOP"
U37: "IC LED DRIVER RGLTR PWM 3A 8SO"
U41 U44: "Single Supply, Multichannel, 31.25 kSPS, 24-Bit, Sigma-Delta ADC with Â±10 V Inputs", Package="VFQFN-40 Analog Devices", Availability="In Stock", Check_prices=https://www.snapeda.com/parts/AD4114BCPZ/Analog+Devices/view-part/?ref=eda, MF="Analog Devices", MP=AD4114BCPZ, Price=None, Purchase-URL=https://pricing.snapeda.com/search/part/AD4114BCPZ/?ref=eda, SnapEDA_Link=https://www.snapeda.com/parts/AD4114BCPZ/Analog+Devices/view-part/?ref=snap
U46: library part IC_I2C_Mux_PCA9540BDP,118, "IC INTERFACE SPECIALIZED"
U49: library part IC_SENSOR_TC1047AVNBTR, "Temperature Sensor Analog, Local -40°C ~ 125°C 10mV/°C SOT-23-3"
VR1: "800-mA 15-V linear voltage regulator", Package="SOT-223-4 Texas Instruments", Check_prices=https://www.snapeda.com/parts/LM1117MP-3.3/NOPB/Texas+Instruments/view-part/?ref=eda, MF="Texas Instruments", MP=LM1117MP-3.3/NOPB, SnapEDA_Link=https://www.snapeda.com/parts/LM1117MP-3.3/NOPB/Texas+Instruments/view-part/?ref=snap
Y1 Y2: Package=None, Availability=Unavailable, MP=ECS-240-12-37B-CKY-TR, Price=None

## Via types
v1: diameter 0.4, hole 0.2, L1 TOP to L6 BOT, tented both sides, 2120 vias

## Nets (pads, with @x,y where several pads share a name; then routed paths per layer and width w, separated by ;. In a path a pad name is that pad's centre, name@x,y a point inside that pad or via, vN(x,y) a via of type N, cw(c..) or ccw(c..) an arc to the next point about the centre after c; other vN are vias at no path point)
+1.8V: C27.2 C38.1 C61.2 C183.2 C186.2 C202.2 C245.2 R239.1 R284.2 R317.2 R340.2 R343.2 U9.5 U10.1 U14.1 U34.1 U38.1 U40.1 U44.40 | length 130.1
  L1 TOP w0.5: v1(37,34.2) 35.3,34.2 34.7,34.8 34.7,39.5 35.8,40.6 39.307,40.6 39.6,40.893 39.6,44.7 38.2,46.1 37.593,46.1 37.3,46.393 v1(37.3,46.7)
  L3 SIGNAL w0.5: v1(27.2,42.2) 27.6,42.2 32.1,46.7 37.439,46.7 38.013,46.126 39.938,46.126 41.322,47.51 51.968,47.51 56.078,43.4 57.85,43.4 59.302,44.852 68.948,44.852 v1(70.175,43.625) 71.451,43.625 72.789,44.963 76.863,44.963 v1(78.2,46.3)
  L4 PWR w0.5: v1(78.2,46.3) 81.5,46.3 82.8,45 84.7,45 86,43.7 v1(87.5,43.7) 88.4,43.7 92.4,47.7 96,47.7 97.3,49 97.459,49 97.81,49.351 97.81,49.51 101.4,53.1 102.833,53.1 v1(103.363,53.63)
  L6 BOT w0.28: C245.2@37.3,47.375 v1(37.3,46.7) 37.3,45.16 37.31,45.15 U44.40@37.355,45.15 ; R343.2@58.175,42.9 58.195,42.9 58.354,43.059 58.354,43.154 59.046,43.846 59.046,43.941 59.205,44.1 C183.2@59.225,44.1 ; v1(59.225,44.775) C183.2@59.225,44.1 ; U38.1@60.525,44.97 60.471,44.916 60.064,44.916 59.248,44.1 C183.2@59.225,44.1 ; v1(70.175,43.625) R317.2@69.6,43.625 C27.2@69.6,44.575 70.56,44.575 U14.1@70.625,44.64 ; v1(78.2,46.3) 78.223,46.277 78.748,46.277 C186.2@78.8,46.225 78.8,46.205 78.959,46.046 78.979,46.046 79.443,45.582 79.76,45.582 79.825,45.517 U40.1@79.825,44.97 ; v1(87.5,43.7) 87.523,43.723 87.948,43.723 C202.2@88,43.775 ; U34.1@88.325,42.17 88.325,43.415 88.225,43.515 88.225,43.52 88.125,43.62 88.125,43.65 C202.2@88,43.775 ; R340.2@89,44.725 89,44.705 88.841,44.546 88.821,44.546 88.64,44.365 88.64,44.347 88.353,44.06 88.335,44.06 88.154,43.879 88.154,43.859 88.07,43.775 C202.2@88,43.775 ; v1(103.363,53.63) 103.396,53.63 103.451,53.575 103.511,53.575 103.675,53.411 R284.2@103.675,52.8 103.7,52.8 104.546,51.954 104.546,51.759 104.705,51.6 C61.2@104.725,51.6 104.738,51.612 106.317,51.612 U10.1@106.33,51.625
  L6 BOT w0.5: C38.1@26.275,41.9 26.575,42.2 v1(27.2,42.2) 27.3,42.1 28.225,42.1 U9.5@28.275,42.05 ; v1(37,34.2) 37.15,34.35 37.55,34.35 37.6,34.4 R239.1@37.6,34.425
+3.3V: C37.1 C41.2 C62.2 C63.2 C64.2 C66.2 C68.2 C69.1 C70.2 C72.2 C81.2 C82.2 C108.2 C109.2 C130.2 C131.2 C178.2 C187.2 C188.2 C189.2 C191.2 C198.2 C199.2 C201.2 C205.2 C210.2 C212.2 C227.2 C234.2 C238.2 C244.2 C259.2 C267.2 C278.2 D11.2 J8.3 J8.4 J16.3 J19.1 J24.1 J27.3 L7.2 R55.2 R72.2 R78.1 R79.1 R80.1 R84.1 R85.1 R86.1 R87.1 R88.1 R91.2 R92.2 R99.1 R100.1 R101.1 R102.1 R109.1 R111.1 R112.1 R113.1 R114.1 R125.2 R128.2 R129.1 R130.1 R139.1 R140.1 R191.1 R192.1 R213.1 R214.1 R215.1 R216.1 R222.1 R223.1 R238.2 R241.2 R255.1 R256.1 R260.1 R262.2 R264.2 R266.1 R270.1 R275.1 R289.2 R309.1 R310.1 R313.1 R315.1 R316.2 R348.1 R349.1 R350.1 R351.1 R352.2 R353.2 R354.2 R355.2 U9.1 U10.23 U10.24 U11.2 U11.24 U12.3 U13.1 U13.8 U14.23 U14.24 U16.2 U16.24 U18.14 U19.14 U20.14 U21.14 U27.4 U28.1 U28.8 U29.1 U29.8 U30.1 U34.23 U34.24 U35.3 U36.1 U38.23 U38.24 U40.23 U40.24 U41.20 U43.1 U44.20 U45.1 U45.8 VR1.2 VR1.4 | length 209
  L1 TOP w0.28: R102.1@7.2,27.925 8.9,27.925 C69.1@9,28.025 ; C69.1@9,27.925 9.134,28.059 9.134,28.77 9.475,29.111 D11.2@9.475,29.2 9.565,29.29 11.21,29.29 11.61,28.89 13.21,28.89 v1(13.8,28.3) ; C69.1@9.04,27.965 9.355,27.65 U13.8@10.425,27.65 ; C68.2@9.1,22.975 U13.1@10.356,22.975 ; U13.1@10.425,23.55 10.425,23.006 10.56,22.871 10.56,22.812 10.862,22.51 16.01,22.51 18,24.5 VR1.4@18,26.5 18,27.05 16.66,28.39 15.247,28.39 15.157,28.3 14.7,28.3 14.6,28.3 ; R100.1@13.8,27.725 v1(13.8,28.3) ; R99.1@14.7,27.725 14.7,28.2 14.6,28.3 ; v1(16.121,4.179) 17.3,5.357 17.3,6 ; v1(17.3,6.8) 17.3,6 ; v1(28.6,4.9) 28.6,5.91 ; C82.2@29.625,19.8 C82.2@29.645,19.8 ; C81.2@29.875,21 29.875,20.03 C82.2@29.645,19.8 ; v1(30.3,6.3) 30.3,6.332 30.422,6.454 30.422,7.022 R350.1@30.5,7.1 R351.1@30.5,8 ; v1@30.323,6.323 30.277,6.277 29.738,6.277 29.546,6.085 29.54,6.079 28.769,6.079 28.6,5.91 ; U27.4@32.05,19.17 31.43,19.17 v1(30.8,19.8) C82.2@29.645,19.8 ; R114.1@34.875,20.1 34.888,20.087 34.888,19.612 v1(34.9,19.6) ; R266.1@40.875,3.4 40.9,3.4 41.8,2.5 42.257,2.5 42.897,3.14 44.504,3.14 44.9,3.536 44.9,5.3 44.325,5.875 42.944,5.875 42.59,6.229 42.59,6.56 R348.1@41.6,7.55 ; R270.1@40.875,6.1 40.875,6.82 41.039,6.984 41.052,6.984 41.168,7.1 v1(41.2,7.1) 41.223,7.123 41.223,7.168 41.6,7.545 R348.1@41.6,7.575 ; v1(45.2,7.1) R349.1@45.2,7.575 ; R213.1@46.375,11.3 v1(46.375,12.2) ; C188.2@47.425,14 47.579,13.846 v1(47.959,13.846) 48.23,13.575 U28.1@49.35,13.575 ; C187.2@47.525,18.4 47.577,18.452 48.289,18.452 v1(48.312,18.475) 48.344,18.475 48.431,18.562 49.437,18.562 U29.1@49.45,18.575 ; U45.8@47.55,5.875 47.563,5.888 48.988,5.888 v1(49,5.9) ; v1(52.6,14) 52.623,13.977 52.623,13.896 52.944,13.575 54.525,13.575 54.796,13.304 55.046,13.304 C191.2@55.2,13.15 ; U29.8@53.55,18.575 53.563,18.587 55.237,18.587 55.25,18.575 C227.2@55.275,18.6 55.3,18.6 56.146,17.754 56.146,17.559 56.305,17.4 R223.1@56.325,17.4 56.312,17.387 56.312,17.012 v1(56.3,17) 56.312,16.987 56.312,16.512 R222.1@56.325,16.5 ; R215.1@56.2,11.3 56.213,11.312 56.213,12.188 R216.1@56.225,12.2 56.302,12.123 56.777,12.123 v1(56.8,12.1) ; R262.2@98.9,40.675 99.8,40.675 100.7,40.675 100.7,40.7 100.845,40.7 100.975,40.57 R353.2@100.975,39.7 ; R260.1@100.788,40.788 101.7,41.7 C199.2@101.7,41.725 ; C212.2@102.025,38.8 v1(102.8,38.8) 104.64,38.8 104.65,38.81 U41.20@104.65,38.845 ; R352.2@104.5,41.825 105.4,41.825 v1(105.4,42.4) ; v1@114.6,18.2 v1(114.7,18.1) ; v1(117.332,17.125) 117.355,17.102 117.943,17.102 118.445,16.6 R85.1@118.475,16.6 R84.1@118.475,17.5 ; v1(117.9,13.25) 117.923,13.227 117.973,13.227 118.046,13.154 118.321,13.154 R275.1@118.475,13 R256.1@118.475,13.9 ; v1(123.1,18.9) 123.132,18.9 123.519,18.513 123.962,18.513 R87.1@124.075,18.4 R86.1@124.075,19.3 ; v1(123.25,15.2) 123.273,15.177 123.423,15.177 123.646,14.954 123.921,14.954 R255.1@124.075,14.8 R88.1@124.075,15.7 ; v1(124.8,50.6) 124.812,50.612 126.087,50.612 C234.2@126.1,50.625 R191.1@127,50.625 127,51.329 127.2,51.529 U43.1@127.2,52.05 ; v1(13.8,28.3) 14.6,28.3 ; 17.3,6 17.39,5.91 28.6,5.91
  L1 TOP w0.5: v1(34,42.4) 34.145,42.255 J8.4@36.87,42.255 J8.3@36.87,44.795 ; L7.2@99.05,36.825 98.7,36.475 98.7,35.475 98.65,35.425 98.65,34.852 99.202,34.3 v1(99.3,34.3) ; C199.2@101.7,41.725 101.75,41.775 101.75,42.05 103.24,43.54 103.29,43.59 U36.1@103.975,43.59 ; C234.2@126.1,50.625 126.1,53.1 126.5,53.5 130.407,53.5 130.7,53.207 130.7,51.593 130.407,51.3 v1(129.9,51.3) 129.75,51.15 129.75,50.675 R192.1@129.7,50.625
  L4 PWR w0.28: v1(34.7,32.4) 35.2,32.9 35.6,32.9
  L6 BOT w0.2: R289.2@46.325,40.8 v1(46.9,40.8)
  L6 BOT w0.28: v1(13.8,28.3) 14.6,28.3 C259.2@14.7,28.2 ; U12.3@14.735,3.865 15.81,3.865 v1@16.123,4.179 ; v1(16.121,4.179) v1@16.123,4.179 ; C66.2@16.441,4.496 v1@16.123,4.179 ; C66.2@16.6,4.675 16.6,4.654 16.125,4.179 v1@16.123,4.179 ; v1(17.3,6.8) 16.61,7.49 16.61,7.89 16.92,8.2 17.7,8.2 18.6,7.3 R241.2@18.6,7.275 ; U35.3@26.335,3.865 26.86,3.865 27.491,4.496 27.941,4.496 28.1,4.655 28.1,4.695 28.259,4.854 28.521,4.854 28.568,4.9 v1(28.6,4.9) ; R55.2@32.862,43.337 R55.2@32.925,43.4 ; R92.2@33.675,28.7 C267.2@33.675,27.8 33.688,27.788 33.688,27.112 v1(33.7,27.1) ; R91.2@33.675,31.5 33.7,31.5 34.577,32.377 34.677,32.377 v1(34.7,32.4) ; R238.2@37.6,31.275 37.625,31.3 38.545,31.3 v1(38.6,31.3) ; v1(39.1,50.4) R78.1@39.1,51.175 ; v1(40.8,26) 40.823,25.977 40.823,25.002 J19.1@40.875,24.95 ; R80.1@42.7,51.175 42.752,51.123 43.377,51.123 v1(43.4,51.1) ; U44.20@43.245,40.65 43.442,40.65 43.452,40.64 43.452,40.08 43.6,39.932 v1(43.6,39.9) ; R355.2@44.4,36.775 44.4,36.795 44.559,36.954 45.098,36.954 C244.2@45.26,37.115 ; v1(45.3,36.4) 45.323,36.423 45.323,36.948 C244.2@45.375,37 45.4,37 46.246,36.154 46.621,36.154 R315.1@46.775,36 46.795,36 46.954,35.841 46.954,35.746 C63.2@47.8,34.9 ; R354.2@45.375,39.7 45.395,39.7 45.56,39.865 45.56,39.867 45.94,40.247 45.94,40.265 46.121,40.446 46.171,40.446 R289.2@46.325,40.6 ; v1(45.8,21.275) C278.2@45.8,22.075 ; v1(46.5,21.275) 46.5,21.308 46.546,21.354 46.546,21.921 R128.2@46.7,22.075 ; v1(46.7,33.2) 46.723,33.223 46.723,33.748 R313.1@46.775,33.8 46.795,33.8 46.954,33.959 46.954,34.054 C63.2@47.8,34.9 ; U30.1@47.3,5.3 C189.2@48.875,5.3 ; C63.2@47.825,34.9 C63.2@47.8,34.9 ; C63.2@47.855,35.1 48.03,35.275 U11.2@49.8,35.275 ; C189.2@48.787,5.387 48.905,5.387 48.977,5.459 48.977,5.877 v1(49,5.9) ; v1(49.4,21.275) R72.2@49.4,22.075 ; R310.1@52.1,32.375 52.254,32.221 52.254,31.946 v1(53.1,31.1) ; v1(52.4,17.8) 52.408,17.808 52.708,17.808 52.965,18.065 52.965,18.59 J16.3@53.225,18.85 ; J27.3@53.325,12.85 53.325,11.775 53.7,11.4 56.1,11.4 v1(56.8,12.1) ; C64.2@53.9,33.425 v1(55.136,33.425) 55.3,33.589 55.3,34.54 55.385,34.625 U11.24@55.6,34.625 ; R309.1@59.225,38.7 R316.2@59.225,39.6 C201.2@59.225,40.6 v1(60.336,40.6) ; U38.24@60.5,39.255 60.5,40.436 v1(60.336,40.6) ; U38.23@61.175,39.23 61.175,40.425 61,40.6 v1(60.336,40.6) ; v1(63.6,28.7) 63.623,28.723 64.148,28.723 R79.1@64.2,28.775 ; v1(69.6,38) C41.2@69.6,38.575 69.631,38.606 70.56,38.606 70.625,38.671 70.65,38.646 70.65,38.364 70.814,38.2 71.136,38.2 71.21,38.274 71.21,39.165 U14.23@71.275,39.23 ; v1(75.3,17.5) 75.313,17.487 75.688,17.487 C70.2@75.7,17.475 ; C70.2@75.6,17.375 75.8,17.175 U16.24@75.8,16.275 ; R111.1@76.5,18.725 R111.1@76.6,18.725 ; R111.1@76.6,18.625 76.6,18.655 R111.1@76.67,18.725 ; v1(77.02,19.2) 76.997,19.177 76.997,19.052 R111.1@76.67,18.725 ; R109.1@77.5,18.725 R111.1@76.67,18.725 ; v1(78.2,36.8) 78.232,36.8 78.329,36.896 78.641,36.896 78.8,37.055 C198.2@78.8,37.075 79.475,37.075 ; U40.24@79.825,39.23 79.825,37.425 79.475,37.075 ; U40.23@80.475,39.23 80.475,37.239 80.311,37.075 79.475,37.075 ; v1(80.8,17.7) 80.813,17.687 81.188,17.687 C72.2@81.2,17.675 ; U16.2@81.6,15.625 81.515,15.71 80.775,15.71 80.51,15.975 80.51,16.575 81.119,17.184 81.119,17.594 C72.2@81.2,17.675 ; R113.1@83,18.725 R112.1@82.2,18.725 82.1,18.725 82.1,18.6 81.2,17.7 C72.2@81.2,17.675 ; C210.2@86.625,35.7 86.779,35.854 87.121,35.854 87.268,36 88.291,36 88.325,36.034 U34.24@88.325,36.43 U34.23@88.975,36.43 ; U10.24@112.07,51.625 112.65,51.625 113.105,51.17 ; U10.23@112.07,52.275 113.225,52.275 113.4,52.1 113.4,51.465 113.105,51.17 ; v1(112.7,50.6) 112.723,50.577 113.048,50.577 C62.2@113.105,50.52 ; C62.2@113.2,50.425 C62.2@113.105,50.52 ; C62.2@113.105,50.52 113.105,51.17
  L6 BOT w0.5: J24.1@28.575,24.95 28.6,24.975 v1(28.6,25.8) ; U9.1@30.875,42.05 30.9,42.075 32.775,42.075 C37.1@32.8,42.1 C37.1@32.862,42.163 ; R55.2@32.862,43.337 C37.1@32.862,42.163 ; v1(34,42.4) 33.1,42.4 C37.1@32.862,42.163
  other v1: 104,17.6 19.4,25.4 20.308,25.435 19.408,26.135 20.308,26.135 104.2,26.5 114.2,26.5 87.3,36 102.1,42.4
+3.3V_DAC_REF: C204.2 L7.1 U36.11 U36.13 | length 12.8
  L1 TOP w0.5: 97.715,44.86 U36.13@99.025,44.86 ; U36.11@99.025,47.4 98.975,47.35 97.883,47.35 97.59,47.057 97.59,44.86 97.59,43.05 98.05,42.59 98.05,41.775 98,41.725 98,41.7 97.95,41.65 97.801,41.65 97.25,41.099 97.25,40.162 98.437,38.975 98.65,38.975 99,38.625 L7.1@99.05,38.625
+5V_CAM: C177.2 C196.2 D13.1 J15.15 JP7.2 R302.2 R303.2 U42.6 | length 62.2
  L1 TOP w0.5: v1(123.617,49.541) 125.4,47.758 125.4,45.151 127.76,42.791 127.76,32.26 v1(127.6,32.1)
  L3 SIGNAL w0.5: v1(99.1,32.3) 99.1,32.273 100.973,30.4 102.549,30.4 103.689,29.26 108.711,29.26 109.059,29.608 109.544,29.608 110.436,30.5 118.95,30.5 120.342,29.107 127.656,29.107 128.1,29.551 128.1,31.6 v1(127.6,32.1)
  L6 BOT w0.5: J15.15@98.25,32.25 98.3,32.3 v1(99.1,32.3) ; v1(116.2,57.2) v1(116.8,57.2) 116.834,57.166 v1(116.834,56.441) 116.834,56.366 117.3,55.9 117.3,52.4 117.6,52.1 118.8,52.1 C177.2@119.2,51.7
  other v1: 122.417,49.541 123.017,49.541 122.417,50.141 123.017,50.141 123.617,50.141
+5V_HD4: C36.2 C42.2 C174.2 C176.2 C200.2 C235.2 D6.1 JP4.2 R29.2 R30.2 R181.1 R182.1 R185.1 R186.1 R277.1 R278.1 R357.1 R358.1 R359.1 R360.1 U5.6 U26.16 U39.16 U43.8 U46.3 | length 99.2
  L1 TOP w0.28: C235.2@126.5,57.7 127.346,58.546 127.516,58.546 127.675,58.705 R277.1@127.675,58.725 R278.1@128.575,58.725 ; C235.2@126.551,57.624 126.551,57.154 127.017,56.688 127.168,56.688 127.2,56.656 U43.8@127.2,56.15
  L1 TOP w0.5: v1(125.6,59.3) 125.5,59.2 125.5,58 125.75,57.75 126.45,57.75 126.5,57.7 C235.2@126.5,57.675
  L4 PWR w0.5: 127.943,57.8 129.551,57.8 129.951,58.2 131.792,58.2 132.052,58.46 142.347,58.46 142.9,57.907 v1(142.9,51.4) v1(142.9,47.9) v1(142.9,44.9) 142.9,26.8 ; U39.16@140.21,26.08 142.18,26.08 v1(142.2,26.1) 142.9,26.8 ; v1(141.9,18.5) 142.9,19.5 v1(142.9,21.6) 142.9,26.8
  L6 BOT w0.28: U46.3@136.725,54.453 136.713,54.465 136.713,55.488 136.7,55.5 136.723,55.523 136.723,55.619 136.746,55.642 136.746,55.921 C200.2@136.9,56.075 136.9,56.095 137.059,56.254 137.554,56.254 138.4,57.1 R360.1@138.4,57.125 v1(138.4,58.4) ; R359.1@137.4,47.675 138.17,47.675 138.5,48.005 R358.1@138.5,48.025 139.552,48.025 139.717,48.19 142.003,48.19 142.293,47.9 ; R357.1@138.5,43.275 139.679,43.275 139.684,43.27 140.703,43.27 141.258,43.825 R182.1@142,43.825 ; R185.1@141.9,17.825 v1(141.9,18.5)
  L6 BOT w0.5: v1(16.501,57.1) v1(17.101,57.1) v1(17.701,57.1) 17.701,55.853 18.207,55.347 18.207,53.693 19,52.9 19,51.9 19.4,51.5 C36.2@20.1,51.5 ; U39.16@140.21,26.08 140.23,26.1 v1(142.2,26.1) C174.2@142.2,25.325 ; U26.16@140.21,52.08 140.481,52.08 141.211,51.35 C176.2@142.4,51.35 142.45,51.4 v1(142.9,51.4) ; R181.1@141.9,20.525 141.95,20.575 141.95,21.307 142.243,21.6 v1(142.9,21.6) ; R182.1@142,43.825 142,44.607 142.293,44.9 v1(142.9,44.9) ; R186.1@142,46.825 142,47.607 142.293,47.9 v1(142.9,47.9)
  other v1: 23.3,49.4 23.9,49.4 24.5,49.4 23.3,50 23.9,50 24.5,50 17.717,56.3
+5V_OUT: C6.2 C11.2 C12.2 C29.2 C232.2 C240.2 JP4.1 JP6.1 JP7.1 L1.2 R3.2 R28.2 R44.2 R301.2 U5.5 U7.5 U42.5 | length 156
  L1 TOP w0.28: v1(25.9,57) 25.923,57.023 25.923,58.023 26.352,58.452 26.777,58.452 R3.2@26.85,58.525
  L4 PWR w0.5: v1(17.507,53.135) 18.042,52.6 22.408,52.6 25.833,52.6 26.124,52.309 26.621,52.309 26.912,52.6 32.6,52.6 34.2,54.2 42.549,54.2 42.849,53.9 46.5,53.9 48.3,55.7 51.426,55.7 53.413,53.713 56.413,53.713 57.6,54.9 67.8,54.9 68.176,54.524 68.176,53.976 69.152,53 81.4,53 85.4,53 86,53.6 90.473,53.6 93.673,56.8 102.749,56.8 103.1,56.449 103.1,55.951 103.081,55.933 103.081,55.519 105,53.6 115.148,53.6 ; v1(116.624,53.276) v1(115.724,53.276) 115.4,53.6 115.148,53.6 ; v1(116.624,54.176) v1(115.724,54.176) 115.274,53.726 115.148,53.6
  L6 BOT w0.28: v1(16.607,54.035) 15.7,54.942 15.7,57.7 16.3,58.3 24.6,58.3 v1(25.9,57)
  L6 BOT w0.5: v1(16.607,43.835) v1@16.607,43.893 ; v1(17.507,43.835) 16.665,43.835 v1@16.607,43.893 ; v1(17.507,44.735) v1(16.607,44.735) ; v1(17.507,53.135) v1(16.607,53.135) ; v1(17.507,54.035) v1(16.607,54.035) v1(16.607,53.135) ; v1(27,44.1) 26.15,44.1 26.1,44.15 26.1,47.5 24.8,48.8 23.034,48.8 22.7,49.134 22.7,49.207 22.407,49.5 15.801,49.5 ; 15.801,49.5 15.801,50.95 16.1,51.249 16.1,52.1 16.607,52.607 v1(16.607,53.135) ; 15.801,49.5 15.801,45.541 v1(16.607,44.735) ; v1@16.607,43.893 v1(16.607,44.735)
  other v1: 27.8,44.1 28.6,44.1